# Altium PCB FC_PCB.PcbDoc
Units mil, origin at the board's own origin, x right, y up, seen from the top; angles counter-clockwise.
Board outline 1750 x 3500 mil, 2 copper layers (Top Layer, Bottom Layer); 3 components, 0 nets, 96 pads, 0 vias.
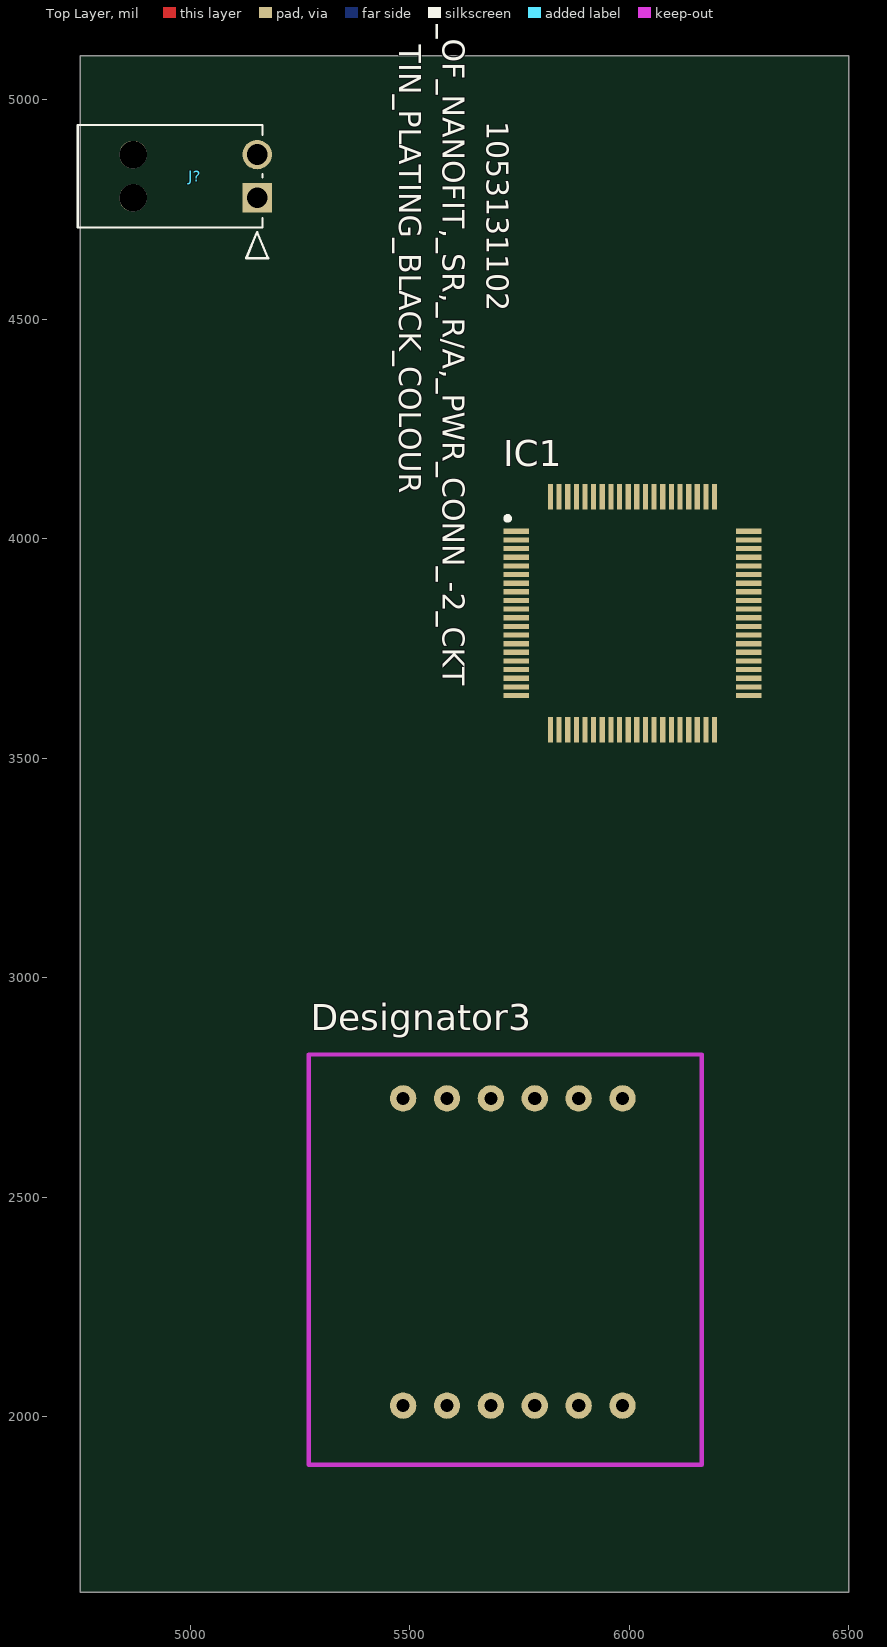
[diagram p0: Top Layer view]
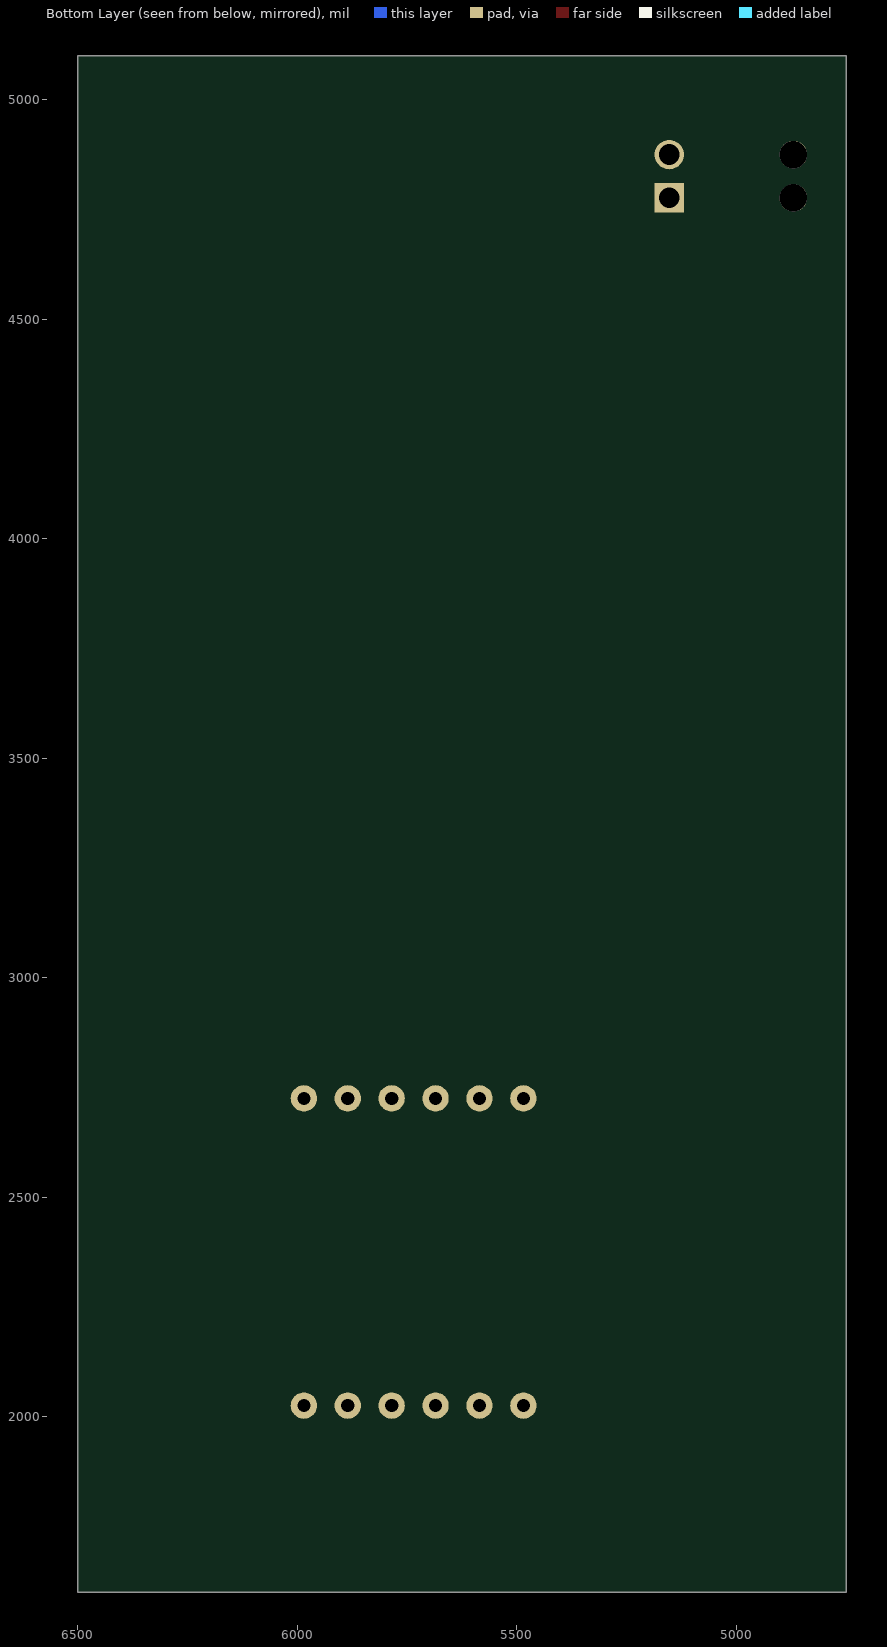
[diagram p1: Bottom Layer view, seen from below]

## Layer stack, top to bottom
Top Solder: solder mask 0.4, Solder Resist, Dk 3.5
Top Layer: signal copper 1.4
Dielectric 1: dielectric 12.6, FR-4, Dk 4.8
Bottom Layer: signal copper 1.4
Bottom Solder: solder mask 0.4, Solder Resist, Dk 3.5

## Board outline
4750,1600 4750,5100 6500,5100 6500,1600

## Design rules (kind name [scope] priority, off if disabled: settings)
Clearance [All] p1: gap=10 ignorepadtopadclearanceinfootprint=FALSE except(0: Arc-Hole Track-Hole SMDPad-Hole THPad-Hole Via-Hole Fill-Hole Poly-Hole Region-Hole Text-Hole)
PolygonConnect [All] p1: connectstyle=Relief reliefconductorwidth=10 reliefentries=4 polygonreliefangle="90 Angle" airgapwidth=10
RoomDefinition MCU [InComponentClass('MCU')] p1: confinementstyle=ConfineIn formatcopy=TRUE lockcomponents=FALSE outline 5692.68,3514.72 6322.68,3514.72 6322.68,4244.72 5692.68,4244.72
RoutingVias [All] p1: holewidth=28 width=50 viastyle="Through Hole" minholewidth=28 minwidth=50 maxholewidth=28 maxwidth=50
SolderMaskExpansion [All] p1: expansion=4 istentingtop=FALSE
Width [All] p1: maxlimit=10 minlimit=10 preferedwidth=10
30 further rules are at their usual default settings.

## Classes and differential pairs
component class MCU: IC1

## Components (designator, comment, footprint, x,y, rotation, side; value= is the part's Value field where it differs from the comment)
Designator3 "Comment" IMU 5485,2025 r0 top
IC1 "ARM Microcontrollers - MCU i.MX RT1010 Crossover MCU with Arm  Cortex -M7 core   Source:  Datasheet" QFP50P1400X1400X160-80N 6007.68,3829.72 r0 top
J? "1053131102" CON_1053131102 5152.68,4776.57 r270 top

## Footprints (in the part's own frame and the unit in brackets; to place one, negate y for a bottom-side part, rotate by r counter-clockwise, add the part's x,y. Pads: shape width x height; smd on the part's side, far side on the other; paste and mask are expansions set on the pad)
CON_1053131102 [mm]
  rect 1.7x1.7 hole 1.2 mask+0.076: 1(0,0)
  round 1.7 hole 1.2 mask+0.076: 2(-2.5,0)
  round 1.6 hole 1.6 unplated mask+0.076: 3(0,-7.18) 4(-2.5,-7.18)
  silkscreen extent -4.22,-10.38 3.5,0.64, body extent 0,0 0.25,0.25, height 0.25
IMU [mil] "IMU Daughter Board"
  round 60 hole 30: 0(0,0) 1(100,0) 2(200,0) 3(300,0) 4(400,0) 5(500,0) 6(0,700) 7(100,700) 8(200,700) 9(300,700) 10(400,700) 11(500,700)
  Top Layer keep-out lines w10: -215,-135 -215,-95 -215,800 680,800 680,760 680,-135 -215,-135
QFP50P1400X1400X160-80N [mil]
  rect 58.07x11.81 smd: 1(-265.28,187.01) 2(-265.28,167.32) 3(-265.28,147.64) 4(-265.28,127.95) 5(-265.28,108.27) 6(-265.28,88.58) 7(-265.28,68.9) 8(-265.28,49.21) 9(-265.28,29.53) 10(-265.28,9.84) 11(-265.28,-9.84) 12(-265.28,-29.53) 13(-265.28,-49.21) 14(-265.28,-68.9) 15(-265.28,-88.58) 16(-265.28,-108.27) 17(-265.28,-127.95) 18(-265.28,-147.64) 19(-265.28,-167.32) 20(-265.28,-187.01) 41(265.28,-187.01) 42(265.28,-167.32) 43(265.28,-147.64) 44(265.28,-127.95) 45(265.28,-108.27) 46(265.28,-88.58) 47(265.28,-68.9) 48(265.28,-49.21) 49(265.28,-29.53) 50(265.28,-9.84) 51(265.28,9.84) 52(265.28,29.53) 53(265.28,49.21) 54(265.28,68.9) 55(265.28,88.58) 56(265.28,108.27) 57(265.28,127.95) 58(265.28,147.64) 59(265.28,167.32) 60(265.28,187.01)
  rect 11.81x58.07 smd: 21(-187.01,-265.28) 22(-167.32,-265.28) 23(-147.64,-265.28) 24(-127.95,-265.28) 25(-108.27,-265.28) 26(-88.58,-265.28) 27(-68.9,-265.28) 28(-49.21,-265.28) 29(-29.53,-265.28) 30(-9.84,-265.28) 31(9.84,-265.28) 32(29.53,-265.28) 33(49.21,-265.28) 34(68.9,-265.28) 35(88.58,-265.28) 36(108.27,-265.28) 37(127.95,-265.28) 38(147.64,-265.28) 39(167.32,-265.28) 40(187.01,-265.28) 61(187.01,265.28) 62(167.32,265.28) 63(147.64,265.28) 64(127.95,265.28) 65(108.27,265.28) 66(88.58,265.28) 67(68.9,265.28) 68(49.21,265.28) 69(29.53,265.28) 70(9.84,265.28) 71(-9.84,265.28) 72(-29.53,265.28) 73(-49.21,265.28) 74(-68.9,265.28) 75(-88.58,265.28) 76(-108.27,265.28) 77(-127.95,265.28) 78(-147.64,265.28) 79(-167.32,265.28) 80(-187.01,265.28)
  silkscreen extent -289,212 -280,221

## Part data
IC1: library part MIMXRT1011DAE5A, Manufacturer_Name=NXP, Package=QFP50P1400X1400X160-80N, Arrow_Part_Number=MIMXRT1011DAE5A, Arrow_Price-Stock=https://www.arrow.com/en/products/mimxrt1011dae5a/nxp-semiconductors, DeviceSetName=MIMXRT1011DAE5A, GateName_1=G$1, Height=1.6mm, LibraryName=MIMXRT1011DAE5A, Manufacturer_Part_Number=MIMXRT1011DAE5A, Mouser_Part_Number=771-MIMXRT1011DAE5A, Mouser_Price-Stock=https://www.mouser.co.uk/ProductDetail/NXP-Semiconductors/MIMXRT1011DAE5A?qs=P1JMDcb91o5GoeF%252BJrcvqQ%3D%3D, SymbolName_1=MIMXRT1011DAE5A
J?: "No Description Available", Mfr_Name="Molex Connector Corporation", Copyright="Copyright (C) 2022 Ultra Librarian. All rights reserved.", Manufacturer_Part_Number=1053131102, RefDes=RefDes, Type=DEV

## Nets (pads, with @x,y where several pads share a name; then routed paths per layer and width w, separated by ;. In a path a pad name is that pad's centre, name@x,y a point inside that pad or via, vN(x,y) a via of type N, cw(c..) or ccw(c..) an arc to the next point about the centre after c; other vN are vias at no path point)
pads on no net: Designator3.0 Designator3.1 Designator3.2 Designator3.3 Designator3.4 Designator3.5 Designator3.6 Designator3.7 Designator3.8 Designator3.9 Designator3.10 Designator3.11 IC1.1 IC1.2 IC1.3 IC1.4 IC1.5 IC1.6 IC1.7 IC1.8 IC1.9 IC1.10 IC1.11 IC1.12 IC1.13 IC1.14 IC1.15 IC1.16 IC1.17 IC1.18 IC1.19 IC1.20 IC1.21 IC1.22 IC1.23 IC1.24 IC1.25 IC1.26 IC1.27 IC1.28 IC1.29 IC1.30 IC1.31 IC1.32 IC1.33 IC1.34 IC1.35 IC1.36 IC1.37 IC1.38 IC1.39 IC1.40 IC1.41 IC1.42 IC1.43 IC1.44 IC1.45 IC1.46 IC1.47 IC1.48 IC1.49 IC1.50 IC1.51 IC1.52 IC1.53 IC1.54 IC1.55 IC1.56 IC1.57 IC1.58 IC1.59 IC1.60 IC1.61 IC1.62 IC1.63 IC1.64 IC1.65 IC1.66 IC1.67 IC1.68 IC1.69 IC1.70 IC1.71 IC1.72 IC1.73 IC1.74 IC1.75 IC1.76 IC1.77 IC1.78 IC1.79 IC1.80 J?.1 J?.2 J?.3 J?.4

## Silkscreen, mask and mechanical layers (free items; w line width, h text height)
Mechanical 1:
  the board outline again, w10

## Text inside footprints (layer, text, board x,y; h text height)
J?: Mechanical 10 "1.6_MM_TO_2.4_MM" at 4065.28,4942.72 h50 r270; Mechanical 10 "RECOMMENDED_PCB_THICKNESS:" at 4165.28,4942.72 h50 r270; Mechanical 10 "MAXIMUM_PACKAGE_HEIGHT:_6.64_MM" at 4315.28,4942.72 h50 r270; Mechanical 10 "NOTE" at 4415.28,4942.72 h50 r270; Top Overlay "TIN_PLATING_BLACK_COLOUR" at 5475.91,5125.79 h50 r270; Top Overlay "HDR_OF_NANOFIT,_SR,_R/A,_PWR_CONN_-2_CKT" at 5575.91,5325.79 h50 r270; Mechanical 13 "TIN_PLATING_BLACK_COLOUR" at 5475.91,5125.79 h50 r270; Mechanical 13 "HDR_OF_NANOFIT,_SR,_R/A,_PWR_CONN_-2_CKT" at 5575.91,5325.79 h50 r270; Mechanical 3 "1.6_MM_TO_2.4_MM" at 4065.28,4942.72 h50 r270; Mechanical 3 "RECOMMENDED_PCB_THICKNESS:" at 4165.28,4942.72 h50 r270; Mechanical 3 "MAXIMUM_PACKAGE_HEIGHT:_6.64_MM" at 4315.28,4942.72 h50 r270; Mechanical 3 "NOTE" at 4415.28,4942.72 h50 r270